# Altium PCB PCB_PXN-2119_2022-04-26.pcbdoc
Units mil, origin at the board's own origin, x right, y up, seen from the top; angles counter-clockwise.
Board outline 6266.45 x 2395.66 mil, 2 copper layers (Top Layer, Bottom Layer); 84 components, 103 nets, 330 pads, 35 vias.
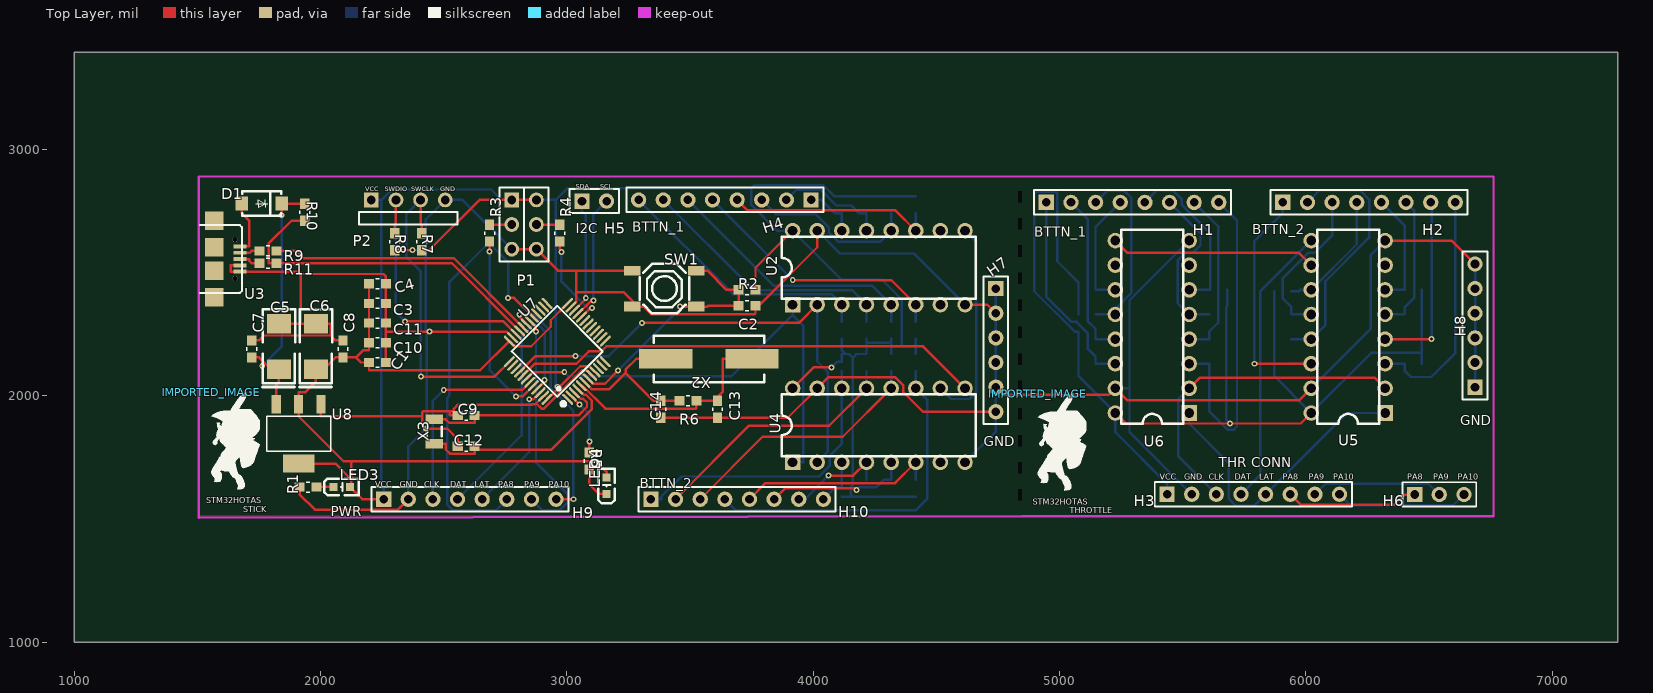
[diagram p0: Top Layer view]
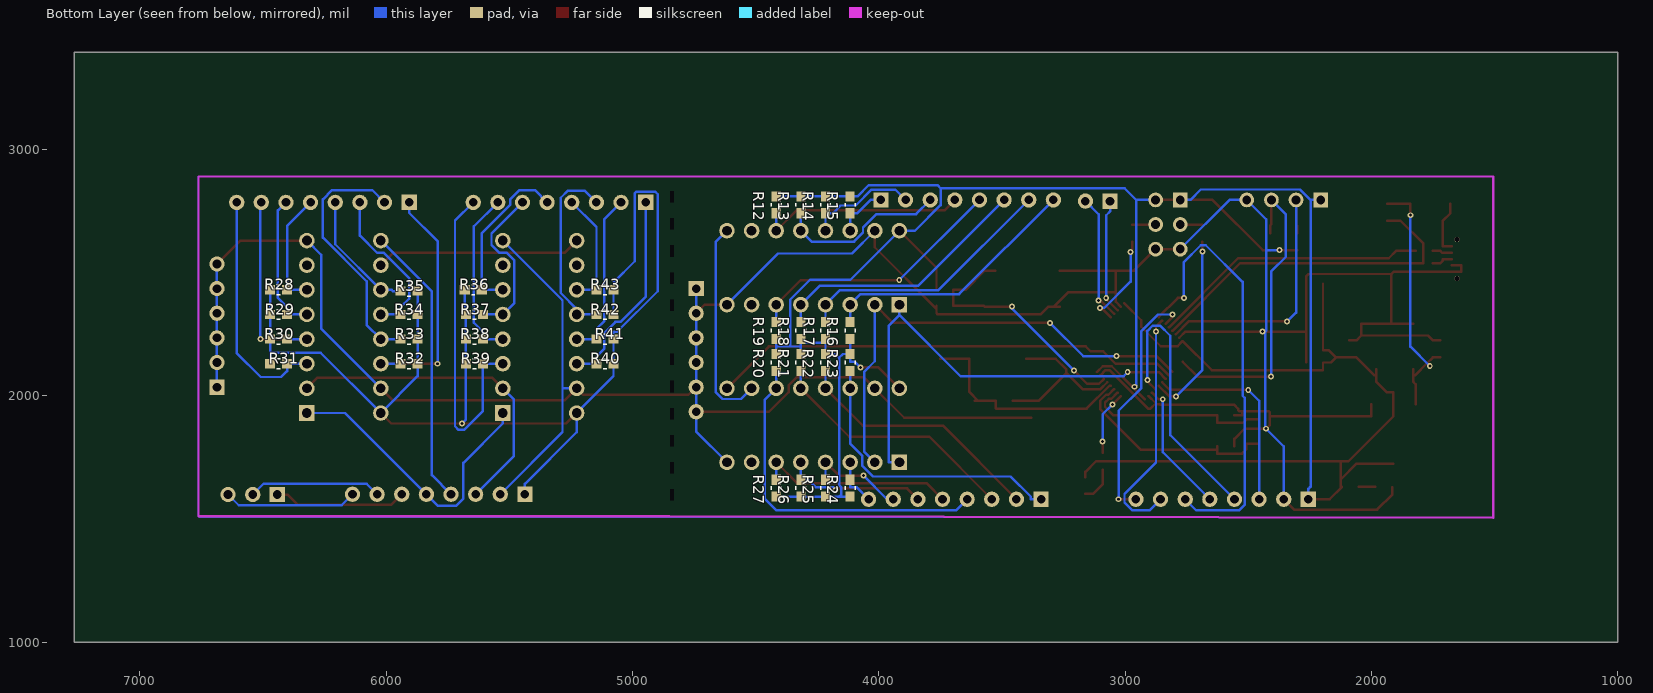
[diagram p1: Bottom Layer view, seen from below]

## Layer stack, top to bottom
Top Layer: signal copper (thickness not stored)
Dielectric: dielectric 12.6, FR-4, Dk 4.8
Bottom Layer: signal copper (thickness not stored)

## Board outline
7266.45,1000 1000,1000 1000,3395.66 7266.45,3395.66
cut-out: 4831.45,1575.66 4846.45,1575.66 4846.45,1620.66 4831.45,1620.66
cut-out: 4831.45,1685.66 4846.45,1685.66 4846.45,1730.66 4831.45,1730.66
cut-out: 4831.45,1795.66 4846.45,1795.66 4846.45,1840.66 4831.45,1840.66
cut-out: 4831.45,1905.66 4846.45,1905.66 4846.45,1950.66 4831.45,1950.66
cut-out: 4831.45,2015.66 4846.45,2015.66 4846.45,2060.66 4831.45,2060.66
cut-out: 4831.45,2125.66 4846.45,2125.66 4846.45,2170.66 4831.45,2170.66
cut-out: 4831.45,2235.66 4846.45,2235.66 4846.45,2280.66 4831.45,2280.66
cut-out: 4831.45,2785.66 4846.45,2785.66 4846.45,2830.66 4831.45,2830.66
cut-out: 4831.45,2675.66 4846.45,2675.66 4846.45,2720.66 4831.45,2720.66
cut-out: 4831.45,2565.66 4846.45,2565.66 4846.45,2610.66 4831.45,2610.66
cut-out: 4831.45,2455.66 4846.45,2455.66 4846.45,2500.66 4831.45,2500.66
cut-out: 4831.45,2345.66 4846.45,2345.66 4846.45,2390.66 4831.45,2390.66

## Components (designator, comment, footprint, x,y, rotation, side; value= is the part's Value field where it differs from the comment)
C1 "100nF" 0603_1608METRIC_PAD1.05X0.95MM_HANDSOLDER#1 2231.45,2135.66 r180 top
C2 "1uF" 0603_1608METRIC_PAD1.05X0.95MM_HANDSOLDER#1 3731.45,2365.66 r180 top
C3 "100nF" 0603_1608METRIC_PAD1.05X0.95MM_HANDSOLDER#1 2231.45,2375.66 r180 top
C4 "100nF" 0603_1608METRIC_PAD1.05X0.95MM_HANDSOLDER#1 2231.45,2455.66 r180 top
C5 "100uF" CASE-C_6032 1831.45,2200.66 r270 top
C6 "330uF" CASE-C_6032 1981.45,2200.66 r270 top
C7 "100nF" 0603_1608METRIC_PAD1.05X0.95MM_HANDSOLDER#1 1721.45,2190.66 r270 top
C8 "100nF" 0603_1608METRIC_PAD1.05X0.95MM_HANDSOLDER#1 2091.45,2190.66 r270 top
C9 "20pF" 0603_1608METRIC_PAD1.05X0.95MM_HANDSOLDER#1 2591.45,1920.66 r0 top
C10 "100nF" 0603_1608METRIC_PAD1.05X0.95MM_HANDSOLDER#1 2231.45,2215.66 r180 top
C11 "100nF" 0603_1608METRIC_PAD1.05X0.95MM_HANDSOLDER#1 2231.45,2295.66 r180 top
C12 "20pF" 0603_1608METRIC_PAD1.05X0.95MM_HANDSOLDER#1 2591.45,1795.66 r0 top
C13 "20pF" 0603_1608METRIC_PAD1.05X0.95MM_HANDSOLDER#1 3611.45,1945.66 r90 top
C14 "20pF" 0603_1608METRIC_PAD1.05X0.95MM_HANDSOLDER#1 3381.45,1945.66 r90 top
D1 "SS110-A" SMA(DO-214AC) 1761.45,2780.66 r0 top
H1 "HDR-F-2.54_1x8" HDR-F-2.54_1X8 5246.45,2785.66 r0 top
H2 "HDR-F-2.54_1x8" HDR-F-2.54_1X8 6206.45,2785.66 r0 top
H3 "THR_CONN-T" HDR-F-2.54_1X8 5736.45,1600.66 r0 top
H4 "HDR-F-2.54_1x8" HDR-F-2.54_1X8 3691.45,2795.66 r180 top
H5 "ADC_S" HDR-F-2.54_1X2 3111.45,2790.66 r0 top
H6 "HDR-F-2.54_1x3" HDR-F-2.54_1X3 6541.45,1599.66 r0 top
H7 "GND_BAR-S" HDR-F-2.54_1X6 4741.45,2235.66 r270 top
H8 "GND_BAR-T" HDR-F-2.54_1X6 6686.45,2235.66 r90 top
H9 "THR_CONN-S" HDR-F-2.54_1X8 2556.45,1580.66 r0 top
H10 "HDR-F-2.54_1x8" HDR-F-2.54_1X8 3641.45,1580.66 r0 top
IMPORTED_IMAGE "IMPORTED_IMAGE" IMPORTED_IMAGE 1556.46,2014.06 r0 top
IMPORTED_IMAGE "IMPORTED_IMAGE" IMPORTED_IMAGE 4911.46,2009.06 r0 top
LED3 "KT-0603R" LED0603-R-RD 2086.45,1630.66 r0 top
LED4 "KT-0603R" LED0603-R-RD 3161.45,1635.66 r90 top
P1 "HDR-IDC-2.54-2X3P" HEADER-2.54-P2×3 2826.45,2695.66 r0 top
P2 "SWD" HEADER-2.54-P4-ANG 2356.45,2795.66 r0 top
R1 "510" 0603_1608METRIC_PAD1.05X0.95MM_HANDSOLDER#1 1949.95,1630.06 r180 top
R2 "10K" 0603_1608METRIC_PAD1.05X0.95MM_HANDSOLDER#1 3731.45,2430.66 r0 top
R3 "100K" 0603_1608METRIC_PAD1.05X0.95MM_HANDSOLDER#1 2686.45,2660.66 r90 top
R4 "100K" 0603_1608METRIC_PAD1.05X0.95MM_HANDSOLDER#1 2971.45,2660.66 r90 top
R5 "510" 0603_1608METRIC_PAD1.05X0.95MM_HANDSOLDER#1 3091.45,1735.66 r90 top
R6 "1M" 0603_1608METRIC_PAD1.05X0.95MM_HANDSOLDER#1 3491.45,1980.66 r0 top
R7 "10K" 0603_1608METRIC_PAD1.05X0.95MM_HANDSOLDER#1 2411.45,2625.66 r90 top
R8 "10K" 0603_1608METRIC_PAD1.05X0.95MM_HANDSOLDER#1 2301.45,2625.66 r90 top
R9 "20" 0603_1608METRIC_PAD1.05X0.95MM_HANDSOLDER#1 1786.85,2588.58 r0 top
R10 "1.5K" 0603_1608METRIC_PAD1.05X0.95MM_HANDSOLDER#1 1936.45,2745.66 r90 top
R11 "20" 0603_1608METRIC_PAD1.05X0.95MM_HANDSOLDER#1 1786.85,2538.58 r0 top
R12 "10K" 0603_1608METRIC_PAD1.05X0.95MM_HANDSOLDER#2 4416.45,2775.66 r270 bottom
R13 "10K" 0603_1608METRIC_PAD1.05X0.95MM_HANDSOLDER#2 4316.45,2775.66 r270 bottom
R14 "10K" 0603_1608METRIC_PAD1.05X0.95MM_HANDSOLDER#2 4216.45,2775.66 r270 bottom
R15 "10K" 0603_1608METRIC_PAD1.05X0.95MM_HANDSOLDER#2 4116.45,2775.66 r270 bottom
R16 "10K" 0603_1608METRIC_PAD1.05X0.95MM_HANDSOLDER#2 4116.45,2265.66 r90 bottom
R17 "10K" 0603_1608METRIC_PAD1.05X0.95MM_HANDSOLDER#2 4216.45,2265.66 r90 bottom
R18 "10K" 0603_1608METRIC_PAD1.05X0.95MM_HANDSOLDER#2 4316.45,2265.66 r90 bottom
R19 "10K" 0603_1608METRIC_PAD1.05X0.95MM_HANDSOLDER#2 4416.45,2265.66 r90 bottom
R20 "10K" 0603_1608METRIC_PAD1.05X0.95MM_HANDSOLDER#2 4416.45,2135.66 r270 bottom
R21 "10K" 0603_1608METRIC_PAD1.05X0.95MM_HANDSOLDER#2 4316.45,2135.66 r270 bottom
R22 "10K" 0603_1608METRIC_PAD1.05X0.95MM_HANDSOLDER#2 4216.45,2135.66 r270 bottom
R23 "10K" 0603_1608METRIC_PAD1.05X0.95MM_HANDSOLDER#2 4116.45,2135.66 r270 bottom
R24 "10K" 0603_1608METRIC_PAD1.05X0.95MM_HANDSOLDER#2 4116.45,1625.66 r90 bottom
R25 "10K" 0603_1608METRIC_PAD1.05X0.95MM_HANDSOLDER#2 4216.45,1625.66 r90 bottom
R26 "10K" 0603_1608METRIC_PAD1.05X0.95MM_HANDSOLDER#2 4316.45,1625.66 r90 bottom
R27 "10K" 0603_1608METRIC_PAD1.05X0.95MM_HANDSOLDER#2 4416.45,1625.66 r90 bottom
R28 "10K" 0603_1608METRIC_PAD1.05X0.95MM_HANDSOLDER#2 6436.45,2430.66 r180 bottom
R29 "10K" 0603_1608METRIC_PAD1.05X0.95MM_HANDSOLDER#2 6436.45,2330.66 r180 bottom
R30 "10K" 0603_1608METRIC_PAD1.05X0.95MM_HANDSOLDER#2 6436.45,2230.66 r180 bottom
R31 "10K" 0603_1608METRIC_PAD1.05X0.95MM_HANDSOLDER#2 6436.45,2130.66 r180 bottom
R32 "10K" 0603_1608METRIC_PAD1.05X0.95MM_HANDSOLDER#2 5906.45,2130.66 r0 bottom
R33 "10K" 0603_1608METRIC_PAD1.05X0.95MM_HANDSOLDER#2 5906.45,2230.66 r0 bottom
R34 "10K" 0603_1608METRIC_PAD1.05X0.95MM_HANDSOLDER#2 5906.45,2330.66 r0 bottom
R35 "10K" 0603_1608METRIC_PAD1.05X0.95MM_HANDSOLDER#2 5906.45,2425.66 r0 bottom
R36 "10K" 0603_1608METRIC_PAD1.05X0.95MM_HANDSOLDER#2 5646.45,2430.66 r180 bottom
R37 "10K" 0603_1608METRIC_PAD1.05X0.95MM_HANDSOLDER#2 5641.45,2330.66 r180 bottom
R38 "10K" 0603_1608METRIC_PAD1.05X0.95MM_HANDSOLDER#2 5641.45,2230.66 r180 bottom
R39 "10K" 0603_1608METRIC_PAD1.05X0.95MM_HANDSOLDER#2 5641.45,2130.66 r180 bottom
R40 "10K" 0603_1608METRIC_PAD1.05X0.95MM_HANDSOLDER#2 5111.45,2130.66 r0 bottom
R41 "10K" 0603_1608METRIC_PAD1.05X0.95MM_HANDSOLDER#2 5111.45,2230.66 r0 bottom
R42 "10K" 0603_1608METRIC_PAD1.05X0.95MM_HANDSOLDER#2 5111.45,2330.66 r0 bottom
R43 "10K" 0603_1608METRIC_PAD1.05X0.95MM_HANDSOLDER#2 5111.45,2430.66 r0 bottom
SW1 "TS-1187A-B-A-B" SW-SMD_4P-L5.1-W5.1-P3.70-LS6.5-TL-2 3396.45,2435.66 r0 top
U2 "SN74HC165N" DIP-16_L19.8-W6.5-P2.54-LS7.6-BL 4266.45,2520.66 r0 top
U3 "Micro USB-B 5P_C40942" USB-MICROB 1511.45,2555.66 r270 top
U4 "SN74HC165N" DIP-16_L19.8-W6.5-P2.54-LS7.6-BL 4266.45,1880.66 r0 top
U5 "SN74HC165N" DIP-16_L19.8-W6.5-P2.54-LS7.6-BL 6171.45,2280.66 r90 top
U6 "SN74HC165N" DIP-16_L19.8-W6.5-P2.54-LS7.6-BL 5376.45,2280.66 r90 top
U7 "STM32F103C8T6" LQFP-48_L7.0-W7.0-P0.50-LS9.0-BL 2961.45,2180.66 r45 top
U8 "AMS1117-3.3" SOT-223 1911.45,1845.66 r180 top
X2 "8MHz" CRYSTAL-SMD_L11.5-W4.8-LS12.7 3576.45,2150.66 r180 top
X3 "32.768kHz" FC-135R_L3.2-W1.5 2461.45,1855.66 r90 top

## Footprints (in the part's own frame and the unit in brackets; to place one, negate y for a bottom-side part, rotate by r counter-clockwise, add the part's x,y. Pads: shape width x height; smd on the part's side, far side on the other; paste and mask are expansions set on the pad)
0603_1608METRIC_PAD1.05X0.95MM_HANDSOLDER#1 [mm]
  rect 1.05x0.95 smd: 1(-0.875,0) 2(0.875,0)
  silkscreen extent -0.17,-0.51 0.17,0.51
0603_1608METRIC_PAD1.05X0.95MM_HANDSOLDER#2 [mm]
  rect 1.05x0.95 smd: 1(0.875,0) 2(-0.875,0)
  silkscreen extent -0.17,-0.51 0.17,0.51
CASE-C_6032 [mm]
  rect 2x2.5 smd: 1(2.35,0) 2(-2.35,0)
  silkscreen extent -3.84,-1.68 4.17,1.7
CRYSTAL-SMD_L11.5-W4.8-LS12.7 [mm]
  rect 5.5x2 smd: 1(-4.45,0) 2(4.45,0)
  silkscreen extent -5.7,-2.4 5.7,2.4
DIP-16_L19.8-W6.5-P2.54-LS7.6-BL [mm]
  rect 1.6x1.6 hole 1: 1(-8.89,-3.81)
  round 1.6 hole 1: 2(-6.35,-3.81) 3(-3.81,-3.81) 4(-1.27,-3.81) 5(1.27,-3.81) 6(3.81,-3.81) 7(6.35,-3.81) 8(8.89,-3.81) 9(8.89,3.81) 10(6.35,3.81) 11(3.81,3.81) 12(1.27,3.81) 13(-1.27,3.81) 14(-3.81,3.81) 15(-6.35,3.81) 16(-8.89,3.81)
  silkscreen extent -10,-3.2 10,3.2
FC-135R_L3.2-W1.5 [mm]
  rect 1x1.8 smd: 1(-1.25,0) 2(1.25,0)
  silkscreen extent -0.51,-0.76 0.51,0.76
HDR-F-2.54_1X2 [mil]
  rect 62x62 hole 35: 1(-50,0)
  round 62 hole 35: 2(50,0)
  silkscreen extent -100,-49 100,50
HDR-F-2.54_1X3 [mil]
  rect 62x62 hole 35: 1(-100,0)
  round 62 hole 35: 2(0,0)
  round 62 hole 36: 3(100,0)
  silkscreen extent -150,-49 150,50
HDR-F-2.54_1X6 [mil]
  rect 62x62 hole 35: 1(-200,0)
  round 62 hole 35: 2(-100,0) 3(0,0) 4(100,0) 5(200,0) 6(300,0)
  silkscreen extent -250,-50 350,50
HDR-F-2.54_1X8 [mil]
  rect 62x62 hole 35: 1(-300,0)
  round 62 hole 35: 2(-200,0) 3(-100,0) 4(0,0) 5(100,0) 6(200,0) 7(300,0) 8(400,0)
  silkscreen extent -350,-50 450,50
HEADER-2.54-P2×3 [mil]
  rect 60x60 hole 36: 1(-50,100)
  round 60 hole 36: 2(50,100) 3(-50,0) 4(50,0) 5(-50,-100) 6(50,-100)
  silkscreen extent -100,-150 100,150
HEADER-2.54-P4-ANG [mil]
  rect 60x60 hole 36: 1(-150,0)
  round 60 hole 36: 2(-50,0) 3(50,0) 4(150,0)
  silkscreen extent -200,-100 200,-50
IMPORTED_IMAGE [mil]
  silkscreen extent 0,-394 197,0
LED0603-R-RD [mm]
  rect 0.8x0.8 smd: 1(0.851,0) 2(-0.851,0)
  silkscreen extent -1.82,-0.86 1.77,0.86
LQFP-48_L7.0-W7.0-P0.50-LS9.0-BL [mm]
  oval 0.27x1.5 smd: 1(-2.75,-4.25) 2(-2.25,-4.25) 3(-1.75,-4.25) 4(-1.25,-4.25) 5(-0.75,-4.25) 6(-0.25,-4.25) 7(0.25,-4.25) 8(0.75,-4.25) 9(1.25,-4.25) 10(1.75,-4.25) 11(2.25,-4.25) 12(2.75,-4.25) 25(2.75,4.25) 26(2.25,4.25) 27(1.75,4.25) 28(1.25,4.25) 29(0.75,4.25) 30(0.25,4.25) 31(-0.25,4.25) 32(-0.75,4.25) 33(-1.25,4.25) 34(-1.75,4.25) 35(-2.25,4.25) 36(-2.75,4.25)
  oval 1.5x0.27 smd: 13(4.25,-2.75) 14(4.25,-2.25) 15(4.25,-1.75) 16(4.25,-1.25) 17(4.25,-0.75) 18(4.25,-0.25) 19(4.25,0.25) 20(4.25,0.75) 21(4.25,1.25) 22(4.25,1.75) 23(4.25,2.25) 24(4.25,2.75) 37(-4.25,2.75) 38(-4.25,2.25) 39(-4.25,1.75) 40(-4.25,1.25) 41(-4.25,0.75) 42(-4.25,0.25) 43(-4.25,-0.25) 44(-4.25,-0.75) 45(-4.25,-1.25) 46(-4.25,-1.75) 47(-4.25,-2.25) 48(-4.25,-2.75)
  silkscreen extent -3.59,-4.46 3.3,3.34
SMA(DO-214AC) [mil]
  rect 50x57.9 smd: 1(-81,0) 2(81,0)
  silkscreen extent -78,-49 79,49
SOT-223 [mm]
  rect 0.95x1.9 smd: 1(-2.3,-3.05) 2(0,-3.05) 3(2.3,-3.05)
  rect 3.25x1.9 smd: 4(0,3.05)
  silkscreen extent -3.3,-1.8 3.3,1.8
SW-SMD_4P-L5.1-W5.1-P3.70-LS6.5-TL-2 [mm]
  rect 1.7x1 smd: 1(-3.3,1.849) 2(3.3,1.85) 3(-3.3,-1.85) 4(3.3,-1.85)
  silkscreen extent -2.55,-2.55 2.55,2.55
USB-MICROB [mm]
  rect 1.9x1.9 smd: 0(-3.95,1.45) 0(-1.2,1.45) 0(1.2,1.45) 0(3.95,1.45)
  rect 0.4x1.35 smd: 1(-1.3,4.125) 2(-0.65,4.125) 3(0,4.125) 4(0.65,4.125) 5(1.3,4.125)
  round 0.5 hole 0.5 unplated: ""(-2,3.6) ""(2,3.6)
  silkscreen extent -3.5,0 3.5,4.3

## Via types
v1: diameter 24.02, hole 12.01, Top Layer to Bottom Layer, tented both sides, 33 vias
v2: diameter 24, hole 12, Top Layer to Bottom Layer, tented both sides, 2 vias

## Nets (pads, with @x,y where several pads share a name; then routed paths per layer and width w, separated by ;. In a path a pad name is that pad's centre, name@x,y a point inside that pad or via, vN(x,y) a via of type N, cw(c..) or ccw(c..) an arc to the next point about the centre after c; other vN are vias at no path point)
+5V: C5.1 C7.2 D1.2 R10.2 U8.3 | length 1089.4
  Top Layer w10: C7.2@1721.45,2156.21 1751.14,2156.21 1774.9,2132.45 ; v1(1763.64,2121.19) 1774.9,2132.45 ; U8.3 1820.9,2047.23 1831.45,2057.78 C5.1@1831.45,2082.96 ; C5.1@1831.45,2108.14 C5.1@1831.45,2082.96 ; v1@1842.45,2733.49 1842.45,2780.66 1906.21,2780.66 1906.76,2780.11 R10.2@1936.45,2780.11 ; 1774.9,2132.45 1824.39,2082.96 C5.1@1831.45,2082.96
  Bottom Layer w10: v1(1763.64,2121.19) 1842.45,2200 v1@1842.45,2733.49
  other v1: 1842.45,2733.49
BOOT0: R3.1 U7.44 | length 760.5
  Top Layer w10: v1@2686.45,2585.78 R3.1@2686.45,2626.21 ; v1(2794.01,1998.18) 2820.73,1998.18 U7.44
  Bottom Layer w10: v1@2686.45,2585.78 2686.45,2105.74 v1(2794.01,1998.18)
  other v1: 2686.45,2585.78
BOOT1: R4.1 U7.20 | length 390.4
  Top Layer w10: R4.1@2971.45,2626.21 2971.45,2594.55 2978.22,2587.78 v1(2978.22,2585.02) ; U7.20 3096.25,2357.21 v1(3101.43,2357.21)
  Bottom Layer w10: v1(2978.22,2585.02) 2978.22,2464.19 3085.2,2357.21 v1(3101.43,2357.21)
D1_1: D1.1 U3.1 | length 224.2
  Top Layer w10: U3.1@1673.85,2606.84 1711.42,2606.84 1711.42,2709.75 1680.45,2740.72 D1.1@1680.45,2780.66
GND: C1.1 C2.1 C3.1 C4.1 C5.2 C6.2 C7.1 C8.1 C9.1 C10.1 C11.1 C12.1 C13.1 C14.1 H3.2 H7.1 H7.2 H7.3 H7.4 H7.5 H7.6 H8.1 H8.2 H8.3 H8.4 H8.5 H8.6 H9.2 P1.5 P1.6 P2.4 R1.2 R8.1 SW1.1 SW1.3 U2.8 U2.15 U3.4 U3.5 U4.8 U4.15 U5.8 U5.15 U6.8 U6.15 U7.8 U7.23 U7.35 U7.47 U8.1 | length 15600.5
  Top Layer w10: U3.4@1673.85,2530.07 1636.29,2530.07 1636.29,2504.48 1673.85,2504.48 1910.11,2504.48 1919.67,2494.92 ; C7.1@1721.45,2225.11 1751.14,2225.11 1771.25,2245.22 2041.65,2245.22 ; C5.2@1831.45,2293.18 1919.67,2293.18 ; R1.2 1915.5,1600.37 1977.27,1538.6 2314.39,1538.6 H9.2@2356.45,1580.66 ; U8.1 2002,1917.35 2413.41,1917.35 ; C8.1@2091.45,2225.11 2061.76,2225.11 2041.65,2245.22 ; C1.1 C10.1 2265.9,2260.93 ; R8.1@2301.45,2591.21 2331.14,2591.21 2331.58,2591.65 v1(2373.73,2591.65) ; C12.1 2557,1825.35 2515.49,1866.86 v1(2428.08,1866.86) 2413.41,1881.53 2413.41,1917.35 ; C9.1 2525.34,1920.66 2525.34,1937.57 ; P1.5@2776.45,2595.66 2876.45,2595.66 2963.65,2508.46 3038.12,2508.46 ; U7.35 2755.91,2260.93 v1(2441.99,2260.93) 2265.9,2260.93 ; U7.47 2876.13,1970.06 ; U7.23 3038.12,2382.6 3038.12,2421.12 ; U7.8 3079.36,2104.52 3063.14,2104.52 2907.18,1948.56 2897.62,1948.56 2876.13,1970.06 ; SW1.3 SW1.3@3288.76,2362.81 ; SW1.1 3222.07,2508.46 3038.12,2508.46 ; C14.1@3381.45,1911.21 3611.45,1911.21 3897,1911.21 U4.15 4060.84,2075.05 4333.56,2075.05 4366.45,2042.16 4366.45,2015.13 4445.92,1935.66 H7.6@4741.45,1935.66 ; C2.1 C2.1@3765.9,2352.87 ; U2.15 4016.45,2603.42 C2.1@3765.9,2352.87 ; U2.8 4706.45,2370.66 H7.2@4741.45,2335.66 ; H7.5@4741.45,2035.66 4772.51,2004.6 5200.39,2004.6 5226.45,2030.66 5274.04,1983.07 5973.86,1983.07 U5.15@6021.45,2030.66 ; U5.8@6321.45,2630.66 6591.45,2630.66 H8.6@6686.45,2535.66 ; 1919.67,2293.18 1919.67,2494.92 ; 1919.67,2293.18 1981.45,2293.18 2041.65,2293.18 2041.65,2245.22 ; 1919.67,2494.92 2256.33,2494.92 2265.9,2485.35 C4.1 C3.1 2265.9,2325.35 C11.1 2265.9,2260.93 ; 2413.41,1917.35 2413.41,1934.66 2416.32,1937.57 2525.34,1937.57 ; 2525.34,1937.57 2536.25,1937.57 2541.09,1942.41 2541.09,1947.51 2557.02,1963.44 2857.16,1963.44 2859,1965.28 2871.35,1965.28 2876.13,1970.06 ; 3038.12,2421.12 3038.12,2508.46 ; 3038.12,2421.12 3230.45,2421.12 SW1.3@3288.76,2362.81 ; SW1.3@3288.76,2362.81 3310.98,2362.81 3341.72,2332.07 3762,2332.07 3765.9,2335.97 C2.1@3765.9,2352.87
  Bottom Layer w10: H9.2@2356.45,1580.66 2356.45,1795.23 v1(2428.08,1866.86) 2430.71,1869.49 v1@2430.71,2260.93 ; v1(2373.73,2591.65) 2428.08,2591.65 ; v1(2441.99,2260.93) v1@2430.71,2260.93 ; P1.5@2776.45,2595.66 2576.45,2795.66 2506.45,2795.66 2428.08,2717.29 2428.08,2591.65 ; U2.15 4109.01,2578.1 4409.01,2578.1 U2.8 ; U4.8 4741.45,1855.66 4741.45,1935.66 4741.45,2035.66 4741.45,2135.66 4741.45,2235.66 4741.45,2335.66 H7.1@4741.45,2435.66 ; U6.15@5226.45,2030.66 5283.89,2030.66 ; U6.8@5526.45,2630.66 5285.06,2389.27 5285.06,2389.08 5283.89,2387.91 5283.89,2030.66 ; H3.2@5536.45,1600.66 5283.89,1853.22 5283.89,2030.66 ; U5.15@6021.45,2030.66 6264.01,2273.22 6264.01,2573.22 U5.8@6321.45,2630.66 ; H8.1@6686.45,2035.66 6686.45,2135.66 6686.45,2235.66 6686.45,2335.66 6686.45,2435.66 H8.6@6686.45,2535.66 ; 2428.08,2591.65 2428.08,2263.56 v1@2430.71,2260.93
H3_6: H3.6 H6.1 | length 540.2
  Top Layer w10: H3.6@5936.45,1600.66 5979.44,1557.67 6357.47,1557.67 6399.46,1599.66 H6.1@6441.45,1599.66
H3_7: H3.7 H6.2 | length 541
  Bottom Layer w10: H3.7@6036.45,1600.66 6079.39,1643.6 6497.51,1643.6 H6.2@6541.45,1599.66
H3_8: H3.8 H6.3 | length 541.4
  Bottom Layer w10: H3.8@6136.45,1600.66 6180.88,1556.23 6598.02,1556.23 H6.3@6641.45,1599.66
OSCIN: C13.2 R6.2 U7.5 X2.1 | length 926.7
  Top Layer w10: U7.5 3063.57,2041.47 3156.66,1948.38 3523.31,1948.38 3525.9,1950.97 R6.2 3581.21,1980.66 3581.76,1980.11 C13.2@3596.61,1980.11 ; C13.2@3611.45,1980.11 C13.2@3596.61,1980.11 ; X2.1 3632.39,2150.66 3632.39,2015.89 C13.2@3596.61,1980.11
OSCOUT: C14.2 R6.1 U7.6 X2.2 | length 664.4
  Top Layer w10: U7.6 3100.29,2027.91 3173.04,2027.91 3238.5,2093.37 ; X2.2@3401.25,2150.66 3281.99,2150.66 3238.5,2107.17 3238.5,2093.37 ; R6.1 3411.69,1980.66 3411.14,1980.11 3396.3,1980.11 3381.45,1980.11 3351.76,1980.11 3238.5,2093.37
P1_3: P1.3 R3.2 | length 90.2
  Top Layer w10: R3.2@2686.45,2695.11 2716.14,2695.11 2716.69,2695.66 P1.3@2776.45,2695.66
P1_4: P1.4 R4.2 | length 95.2
  Top Layer w10: P1.4@2876.45,2695.66 2941.21,2695.66 2941.76,2695.11 R4.2@2971.45,2695.11
PA0: U7.10
PA1: U7.11
PA2: U7.12
PA3: U7.13
PA4: U7.14
PA5: U7.15
PA6: U7.16
PA7: U7.17
PA8: H9.6 U7.29 | length 1786
  Top Layer w10: v1(2761.93,2397.75) 2786.12,2397.75 U7.29
  Bottom Layer w10: H9.6@2756.45,1580.66 2711.39,1535.6 2538,1535.6 2514.34,1559.26 2514.34,1991.63 2523.61,2000.9 2523.61,2462.57 2672.85,2611.81 2693.25,2611.81 2761.93,2543.13 v1(2761.93,2397.75)
PA9: H9.7 U7.30 | length 979.9
  Top Layer w10: U7.30 2874.87,2281.16 v1(2874.87,2262.09)
  Bottom Layer w10: H9.7@2856.45,1580.66 2901.47,1535.64 2970.93,1535.64 3002.86,1567.57 3002.86,1602.36 2874.87,1730.35 v1(2874.87,2262.09)
PA10: H9.8 U7.31 | length 996.4
  Top Layer w10: v1(2807.18,2330.46) 2807.18,2321.02 U7.31 ; H9.8@2956.45,1580.66 v1(3026.59,1580.66)
  Bottom Layer w10: v1(2807.18,2330.46) 2867.12,2330.46 2934.32,2263.26 2934.32,2032.08 3026.59,1939.81 v1(3026.59,1580.66)
PA11: R9.2 U7.32 | length 1129.6
  Top Layer w10: R9.2 1900.15,2588.58 1930.07,2558.66 2541.69,2558.66 U7.32
PA12: R10.1 R11.2 U7.33 | length 1397.5
  Top Layer w10: R10.1@1936.45,2711.21 1882.44,2711.21 1789.57,2618.34 1789.57,2538.65 1789.64,2538.58 R11.2 1833.16,2538.58 1852.96,2538.58 2533.94,2538.58 U7.33
PA15: U7.38
PB0: U7.18
PB1: U7.19
PB3: U7.39
PB4: U2.2 U4.2 U7.40 | length 1997.1
  Top Layer w10: U7.40@2808.34,2097.14 2872.58,2161.38 v1(3035.61,2161.38) ; v1(3305.41,2296.45) 3942.24,2296.45 U2.2
  Bottom Layer w10: v1(3035.61,2161.38) 3170.34,2161.38 v1(3305.41,2296.45) ; U4.2 4059.53,1773.74 4059.53,2097.79 4016.45,2140.87 U2.2
PB5: U4.9 U7.41 | length 1913.6
  Top Layer w10: U7.41 2868.77,2129.74 3038.25,2129.74 3089.18,2180.67 3139.82,2180.67 3160.24,2201.09 4446.02,2201.09 U4.9
PB6: U2.1 U4.1 U7.42 | length 1902.4
  Top Layer w10: U7.42 2863.28,2096.41 v1(2989.74,2096.41)
  Bottom Layer w10: v1(2989.74,2096.41) 3006.42,2079.73 3668,2079.73 3916.45,2328.18 ; U4.1 3937.69,1730.66 3958.93,1730.66 3960.2,1731.93 3960.2,2284.43 3916.45,2328.18 ; U2.1 3916.45,2370.47 3916.45,2328.18
PB7: H9.3 U7.43 | length 824.4
  Top Layer w10: v1@2500.55,2024.42 2819.13,2024.42 U7.43
  Bottom Layer w10: H9.3@2456.45,1580.66 2456.45,1980.32 v1@2500.55,2024.42
  other v1: 2500.55,2024.42
PB8: H9.4 U7.45 | length 1139.7
  Top Layer w10: U7.45 2909.6,2059.21 v1(2909.6,2064.9)
  Bottom Layer w10: H9.4@2556.45,1580.66 2817.08,1841.29 2817.08,2244.17 2858.4,2285.49 2888.3,2285.49 2909.6,2264.19 v1(2909.6,2064.9)
PB9: H9.5 U7.46 | length 540.5
  Top Layer w10: v1(2847.6,1986.5) 2864.73,1986.5 U7.46
  Bottom Layer w10: H9.5@2656.45,1580.66 2847.6,1771.81 v1(2847.6,1986.5)
PB10: H5.2 U7.21 | length 510
  Top Layer w10: U7.21 3045.29,2333.77 3099.47,2387.95 v1(3107.53,2387.95)
  Bottom Layer w10: v1(3107.53,2387.95) 3107.53,2736.74 H5.2@3161.45,2790.66
PB11: H5.1 U7.22 | length 468.4
  Top Layer w10: U7.22 3076.96,2393.6 v1(3076.96,2398.06)
  Bottom Layer w10: H5.1@3061.45,2790.66 3061.45,2748.67 3076.96,2733.16 v1(3076.96,2398.06)
PB12: U7.25
PB13: U7.26
PB14: U7.27
PB15: U7.28
PC13: R5.2 U7.2 | length 260.5
  Top Layer w10: U7.2 3051.18,1965.66 v2(3051.45,1965.66) ; R5.2 v2(3091.45,1815.66)
  Bottom Layer w10: v2(3051.45,1965.66) 3091.45,1925.66 v2(3091.45,1815.66)
PC14: C9.2 U7.3 X3.2 | length 755.4
  Top Layer w10: X3.2 2507.88,1904.88 2521.86,1890.9 2625.83,1890.9 2625.9,1890.97 C9.2 3046.69,1920.66 3081.99,1955.96 3081.99,1972.9 3066.17,1988.72 3055.96,1988.72 U7.3
PC15: C12.2 U7.4 X3.1 | length 878.7
  Top Layer w10: X3.1@2461.46,1806.45 2507.88,1806.45 2507.88,1783.45 2525.43,1765.9 2625.83,1765.9 2625.9,1765.97 C12.2@2625.9,1780.82 ; C12.2 C12.2@2625.9,1780.82 ; U7.4 3067.74,2004.78 3077.42,2004.78 3101.67,1980.53 3101.67,1947.13 2935.36,1780.82 C12.2@2625.9,1780.82
R1_1: LED3.2 R1.1 | length 68.6
  Top Layer w10: R1.1@1984.35,1630.66 LED3.2
R5_1: LED4.2 R5.1 | length 146.4
  Top Layer w10: R5.1 3091.45,1640.66 3129.95,1602.16 LED4.2
R9_1: R9.1 U3.2 | length 81.6
  Top Layer w10: U3.2@1673.85,2581.25 1713.41,2581.25 1720.74,2588.58 R9.1
R11_1: R11.1 U3.3 | length 90.2
  Top Layer w10: U3.3@1673.85,2555.66 1711.42,2555.66 1711.42,2547.9 1720.74,2538.58 R11.1
R28_1: H2.5 R28.1 U5.6 | length 475.1
  Bottom Layer w10: H2.5@6306.45,2785.66 6402,2690.11 R28.1 U5.6@6321.45,2430.66
R29_1: H2.6 R29.1 U5.5 | length 564.5
  Bottom Layer w10: U5.5@6321.45,2330.66 R29.1 6402,2360.35 6439.12,2397.47 6439.12,2752.99 H2.6@6406.45,2785.66
R30_1: H2.7 R30.1 U5.4 | length 826
  Top Layer w10: U5.4@6321.45,2230.66 v1(6510.29,2230.66)
  Bottom Layer w10: U5.4@6321.45,2230.66 R30.1 ; H2.7@6506.45,2785.66 6510.29,2781.82 v1(6510.29,2230.66)
R31_1: H2.8 R31.1 U5.3 | length 976.2
  Bottom Layer w10: U5.3@6321.45,2130.66 R31.1 6402,2100.97 6426.11,2076.86 6508.69,2076.86 6606.45,2174.62 H2.8@6606.45,2785.66
R32_1: H2.1 R32.1 U5.14 | length 1013.7
  Top Layer w10: v1(5791.12,2130.66) U5.14@6021.45,2130.66
  Bottom Layer w10: v1(5791.12,2130.66) 5791.12,2628.34 5906.45,2743.67 H2.1@5906.45,2785.66 ; R32.1 U5.14@6021.45,2130.66
R33_1: H2.2 R33.1 U5.13 | length 1031.2
  Bottom Layer w10: R33.1 6021.45,2230.66 6078.89,2288.1 6078.89,2465.39 6256.45,2642.95 6256.45,2797.95 6219.15,2835.25 6056.04,2835.25 H2.2@6006.45,2785.66
R34_1: H2.3 R34.1 U5.12 | length 648.5
  Bottom Layer w10: U5.12@6021.45,2330.66 R34.1 5940.9,2360.35 5906.7,2394.55 5906.7,2478.58 6008.74,2580.62 6036.06,2580.62 6106.45,2651.01 H2.3@6106.45,2785.66
R35_1: H2.4 R35.1 U5.11 | length 514.3
  Bottom Layer w10: R35.1 5972.56,2425.66 5977.56,2430.66 6021.45,2430.66 6206.45,2615.66 H2.4@6206.45,2785.66
R36_1: H1.5 R36.1 U6.6 | length 686.7
  Bottom Layer w10: H1.5@5346.45,2785.66 5396.04,2835.25 5459.15,2835.25 5496.45,2797.95 5496.45,2775.25 5612,2659.7 R36.1 U6.6@5526.45,2430.66
R37_1: H1.6 R37.1 U6.5 | length 663.5
  Bottom Layer w10: H1.6@5446.45,2785.66 5572.19,2659.92 5572.19,2612.57 5540.3,2580.68 5509.92,2580.68 5479.28,2550.04 5479.28,2377.83 5526.45,2330.66 R37.1
R38_1: H1.7 R38.1 U6.4 | length 691.4
  Bottom Layer w10: U6.4@5526.45,2230.66 R38.1 5607,2260.35 5644.09,2297.44 5644.09,2688.02 H1.7@5546.45,2785.66
R39_1: H1.8 R39.1 U6.3 | length 1362.5
  Bottom Layer w10: U6.3@5526.45,2130.66 R39.1 5607,1939.19 5683.79,1862.4 5705.79,1862.4 5720.38,1876.99 5720.38,2711.73 H1.8@5646.45,2785.66
R40_1: H1.1 R40.1 U6.14 | length 830.4
  Bottom Layer w10: H1.1@4946.45,2785.66 4946.45,2402.28 5048.18,2300.55 5069.08,2300.55 5114.17,2255.46 5114.17,2192.08 5145.9,2160.35 R40.1 U6.14@5226.45,2130.66
R41_1: H1.2 R41.1 U6.13 | length 676.7
  Bottom Layer w10: H1.2@5046.45,2785.66 5114.13,2717.98 5114.13,2304.41 5145.9,2272.64 R41.1 U6.13@5226.45,2230.66
R42_1: H1.3 R42.1 U6.12 | length 757.7
  Bottom Layer w10: R42.1 5226.45,2330.66 5226.45,2353.37 5291.24,2418.16 5291.24,2804.28 5262.06,2833.46 5194.25,2833.46 H1.3@5146.45,2785.66
R43_1: H1.4 R43.1 U6.11 | length 477.2
  Bottom Layer w10: U6.11@5226.45,2430.66 R43.1 5145.9,2685.11 H1.4@5246.45,2785.66
RESET: C2.2 R2.1 SW1.2 SW1.4 U7.7 | length 1023
  Top Layer w10: U7.7 3107.49,2048.54 3153.92,2048.54 v1(3208.17,2102.79) ; v1(3459.81,2362.81) SW1.4 3548.6,2362.81 3570.83,2362.81 3573.68,2365.66 C2.2 R2.1 3648.68,2430.66 3570.83,2508.51 SW1.2
  Bottom Layer w10: v1(3208.17,2102.79) 3459.81,2354.43 v1(3459.81,2362.81)
S$65: 
S$10643: 
S$10647: 
S$110540: 
S$110565: 
S$110569: 
SWCLK: P2.3 R7.2 U7.37 | length 1288.4
  Top Layer w10: P2.3@2406.45,2795.66 2406.45,2696.77 2411.45,2691.77 R7.2@2411.45,2660.11 ; v1@2407.65,2078.25 2705.92,2078.25 U7.37
  Bottom Layer w10: P2.3@2406.45,2795.66 2347.51,2736.72 2347.51,2564.89 2407.65,2504.75 v1@2407.65,2078.25
  other v1: 2407.65,2078.25
SWDIO: P2.2 R8.2 U7.34 | length 1119.5
  Top Layer w10: R8.2@2301.45,2660.11 2301.45,2691.77 2306.45,2696.77 P2.2@2306.45,2795.66 ; v1(2342.46,2302.21) 2742.46,2302.21 U7.34
  Bottom Layer w10: P2.2@2306.45,2795.66 2306.45,2338.22 v1(2342.46,2302.21)
U2_3: H4.8 R16.1 U2.3 | length 1071.6
  Bottom Layer w10: H4.8@3291.45,2795.66 3673.9,2413.21 4073.9,2413.21 U2.3 R16.1@4116.45,2300.11
U2_4: H4.7 R17.1 U2.4 | length 1071.6
  Bottom Layer w10: H4.7@3391.45,2795.66 3757.84,2429.27 4157.84,2429.27 U2.4 R17.1@4216.45,2300.11
U2_5: H4.6 R18.1 U2.5 | length 1071.6
  Bottom Layer w10: H4.6@3491.45,2795.66 3840.41,2446.7 4240.41,2446.7 U2.5 R18.1@4316.45,2300.11
U2_6: H4.5 R19.1 U2.6 | length 1071.6
  Top Layer w10: v1(3917.1,2470.01) 4317.1,2470.01 U2.6
  Bottom Layer w10: H4.5@3591.45,2795.66 v1(3917.1,2470.01) ; R19.1@4416.45,2300.11 U2.6
U2_7: U2.7
U2_9: U2.9 U4.10 | length 849.6
  Bottom Layer w10: U4.10 4559.57,1987.54 4633.85,1987.54 4662.85,2016.54 4662.85,2624.26 U2.9
U2_10: U2.10
U2_11: H4.4 R12.1 U2.11 | length 847.3
  Top Layer w10: H4.4@3691.45,2795.66 3733.71,2753.4 4333.71,2753.4 U2.11
  Bottom Layer w10: U2.11 R12.1@4416.45,2741.21
U2_12: H4.3 R13.1 U2.12 | length 696.1
  Bottom Layer w10: H4.3@3791.45,2795.66 3848.92,2738.19 4009.81,2738.19 4064.27,2683.73 4064.27,2662.62 4100.17,2626.72 4272.51,2626.72 U2.12 R13.1@4316.45,2741.21
U2_13: H4.2 R14.1 U2.13 | length 452.9
  Bottom Layer w10: H4.2@3891.45,2795.66 3933.51,2837.72 4029.01,2837.72 4093.79,2772.94 4155.03,2772.94 4186.76,2741.21 4216.45,2741.21 U2.13
U2_14: H4.1 R15.1 U2.14 | length 218.8
  Bottom Layer w10: H4.1@3991.45,2795.66 4033.44,2795.66 4086.76,2742.34 4086.76,2741.21 4116.45,2741.21 U2.14
U4_3: H10.8 R24.1 U4.3 | length 197
  Bottom Layer w10: H10.8@4041.45,1580.66 4089.24,1628.45 4116.45,1628.45 4116.45,1660.11 U4.3
U4_4: H10.7 R25.1 U4.4 | length 407.7
  Top Layer w10: v1@4062.25,1676.63 4162.42,1676.63 U4.4
  Bottom Layer w10: H10.7@3941.45,1580.66 3966.28,1580.66 v1@4062.25,1676.63 ; R25.1@4216.45,1660.11 U4.4
  other v1: 4062.25,1676.63
U4_5: H10.6 R26.1 U4.5 | length 583.3
  Top Layer w10: H10.6@3841.45,1580.66 3885.42,1624.63 4169.28,1624.63 v1(4175.07,1618.84)
  Bottom Layer w10: v1(4175.07,1618.84) 4184.61,1628.38 4255.03,1628.38 4286.76,1660.11 4316.45,1660.11 U4.5
U4_6: H10.5 R27.1 U4.6 | length 807.7
  Top Layer w10: H10.5@3741.45,1580.66 3807.26,1646.47 4332.26,1646.47 U4.6
  Bottom Layer w10: R27.1@4416.45,1660.11 U4.6
U4_7: U4.7
U4_11: H10.4 R20.1 U4.11 | length 1397.9
  Bottom Layer w10: H10.4@3641.45,1580.66 3686.67,1535.44 4415.68,1535.44 4463.32,1583.08 4463.32,1983.79 U4.11 R20.1@4416.45,2101.21
U4_12: H10.3 R21.1 U4.12 | length 1031.9
  Top Layer w10: H10.3@3541.45,1580.66 3794.98,1834.19 4119.98,1834.19 U4.12
  Bottom Layer w10: U4.12 R21.1@4316.45,2101.21
U4_13: H10.2 R22.1 U4.13 | length 1031.9
  Top Layer w10: H10.2@3441.45,1580.66 3740.27,1879.48 4065.27,1879.48 U4.13
  Bottom Layer w10: U4.13 R22.1@4216.45,2101.21
U4_14: H10.1 R23.1 U4.14 | length 1193.3
  Bottom Layer w10: H10.1@3341.45,1580.66 3383.44,1580.66 3383.44,1591.16 3465.17,1672.89 4023.64,1672.89 4066.37,1715.62 4066.37,1756.46 4116.45,1806.54 U4.14 R23.1@4116.45,2101.21
U5_1: H3.5 U5.1 U6.1 | length 1216.6
  Bottom Layer w10: U6.1@5526.45,1930.66 5526.45,1888.17 5686.45,1728.17 5686.45,1583.77 5716.36,1553.86 5789.65,1553.86 5836.45,1600.66 6166.45,1930.66 U5.1@6321.45,1930.66
U5_2: H3.3 U5.2 U6.2 | length 1344
  Top Layer w10: U6.2@5526.45,2030.66 5570.2,2074.41 6277.7,2074.41 U5.2@6321.45,2030.66
  Bottom Layer w10: U6.2@5526.45,2030.66 5481.55,1985.76 5481.55,1755.56 H3.3@5636.45,1600.66
U5_7: U5.7
U5_9: H3.4 U5.9 | length 1148.1
  Bottom Layer w10: H3.4@5736.45,1600.66 5814.18,1678.39 5814.18,2423.39 U5.9@6021.45,2630.66
U5_10: U5.10 U6.9 | length 836.4
  Top Layer w10: U6.9@5226.45,2630.66 5276.45,2580.66 5971.45,2580.66 U5.10@6021.45,2530.66
U6_7: U6.7
U6_10: U6.10
VBAT: U7.1
VCC: C1.2 C3.2 C4.2 C6.1 C8.2 C10.2 C11.2 H9.1 LED3.1 LED4.1 P1.1 P1.2 P2.1 R2.2 R7.1 R12.2 R13.2 R14.2 R15.2 R16.2 R17.2 R18.2 R19.2 R20.2 R21.2 R22.2 R23.2 R24.2 R25.2 R26.2 R27.2 U2.16 U4.16 U7.9 U7.24 U7.36 U7.48 U8.2 U8.4 | length 11717.3
  Top Layer w10: U8.4@1911.45,1725.58 2060.52,1725.58 2124.95,1661.15 ; C6.1@1981.45,2108.14 C6.1@1981.45,2082.96 ; LED3.1@2124.95,1630.66 LED3.1@2124.95,1645.91 ; C4.2 C3.2 C11.2 C10.2 2197,2185.97 2174.55,2185.97 2144.79,2156.21 ; H9.1@2256.45,1580.66 2169.95,1580.66 LED3.1 2124.95,1635.66 2124.95,1661.15 ; R7.1@2411.45,2591.21 2441.14,2591.21 2645.59,2795.66 2776.45,2795.66 P1.2@2876.45,2795.66 ; U7.48 v1@2966.58,2032.67 ; v1(2962.04,2037.2) v1@2966.58,2032.67 ; U7.24 2934.89,2307.21 2934.89,2280.63 2855.81,2201.55 2787.45,2201.55 U7.36 2648.34,2104.18 2198.79,2104.18 2197,2105.97 C1.2 2165.34,2135.66 2144.79,2156.21 ; U7.9 3091.12,2120.58 3054.49,2120.58 v1@2966.58,2032.67 ; LED4.1 3161.45,1691.65 3118.34,1734.76 2124.95,1734.76 ; R2.2 3765.9,2520.11 U2.16 ; U4.16 4001.34,2115.55 v1(4074.38,2115.55) ; C6.1@1981.45,2082.96 1988.51,2082.96 2061.76,2156.21 2091.45,2156.21 2117.17,2156.21 2144.79,2156.21 ; C6.1@1981.45,2082.96 1981.45,2057.78 1937.8,2014.13 1911.45,2014.13 1911.45,1965.74 1911.45,1917.35 2094.04,1734.76 2124.95,1734.76 ; 2124.95,1661.15 2124.95,1734.76
  Bottom Layer w10: P2.1@2206.45,2795.66 2247.44,2795.66 ; H9.1@2256.45,1580.66 2256.45,1622.65 2247.44,1631.66 2247.44,2795.66 ; P1.1@2776.45,2795.66 2735.46,2795.66 2693.17,2837.95 2289.73,2837.95 2247.44,2795.66 ; P1.2@2876.45,2795.66 2955.16,2795.66 ; v1(2962.04,2037.2) 2955.16,2044.08 2955.16,2795.66 ; v1(4074.38,2115.55) 4097.28,2138.45 4116.45,2138.45 4116.45,2170.11 R23.2@4131.3,2170.11 ; R24.2@4116.45,1591.21 4146.14,1591.21 4161.37,1591.21 ; R16.2@4116.45,2231.21 4116.45,2184.96 R23.2@4131.3,2170.11 ; R17.2@4216.45,2231.21 R17.2@4216.45,2215.94 ; R21.2@4316.45,2170.11 4316.45,2200.66 ; R18.2@4316.45,2231.21 R18.2@4316.45,2215.94 ; R27.2@4416.45,1591.21 4316.45,1591.21 4216.45,1591.21 4161.37,1591.21 ; R20.2@4416.45,2170.11 4416.45,2200.66 ; R19.2@4416.45,2231.21 4416.45,2200.66 ; R12.2@4416.45,2810.11 4316.45,2810.11 4216.45,2810.11 4116.45,2810.11 4086.76,2810.11 4040.98,2855.89 3762.16,2855.89 3749.07,2842.8 ; 2955.16,2795.66 3002.3,2842.8 3749.07,2842.8 ; 3749.07,2842.8 3749.07,2774.87 3853.28,2670.66 U2.16 4115.64,2471.47 4279.02,2471.47 4360.2,2390.29 4360.2,2200.66 ; R23.2@4131.3,2170.11 4146.14,2170.11 4161.37,2154.88 ; 4161.37,1591.21 4152.01,1600.57 4152.01,1628.39 4161.37,1637.75 4161.37,2154.88 ; 4161.37,2154.88 4176.6,2170.11 4216.45,2170.11 R17.2@4216.45,2215.94 ; R17.2@4216.45,2215.94 R18.2@4316.45,2215.94 ; 4316.45,2200.66 4360.2,2200.66 ; 4316.45,2200.66 R18.2@4316.45,2215.94 ; 4360.2,2200.66 4416.45,2200.66
VCC_THR: H3.1 R28.2 R29.2 R30.2 R31.2 R32.2 R33.2 R34.2 R35.2 R36.2 R37.2 R38.2 R39.2 R40.2 R41.2 R42.2 R43.2 U5.16 U6.16 | length 4865.7
  Top Layer w10: U6.16@5226.45,1930.66 5269.01,1888.1 v1(5692.03,1888.1) 5978.89,1888.1 U5.16@6021.45,1930.66
  Bottom Layer w10: R42.2 R43.2 5077,2460.35 4990.79,2546.56 4990.79,2822.13 4985,2827.92 4906.61,2827.92 4897.45,2818.76 4897.45,2425.05 5062.15,2260.35 5077,2260.35 R41.2 R40.2 5077,2080.11 5226.45,1930.66 5226.45,1852.65 5436.45,1642.65 H3.1@5436.45,1600.66 ; R36.2 5680.9,2400.97 5680.9,2365.35 5675.9,2360.35 5675.9,2345.51 R37.2 R38.2 R39.2 5675.9,1904.23 v1(5692.03,1888.1) ; R35.2 R34.2 R33.2 R32.2 5872,2080.11 6021.45,1930.66 6265.2,2174.41 6470.9,2174.41 ; R31.2 6470.9,2174.41 ; R28.2 R29.2 R30.2 6470.9,2174.41
pads on no net: U3. U3.0

## Polygon pours and split planes (outlines as drawn)
GND on Bottom Layer (solid): 1506.45,1505.66 6756.45,1505.66 6761.45,1510.66 6761.45,2890.66 1506.45,2890.66
GND on Top Layer (solid): 1506.45,2890.66 6761.45,2890.66 6761.45,1510.66 1511.45,1510.66 1506.45,1505.66

## Silkscreen, mask and mechanical layers (free items; w line width, h text height)
Top Overlay:
  text "SDA" at 3036.45,2840.82 h19.68
  text "SCL" at 3136.45,2840.82 h19.68
  text "VCC" at 2181.45,2830.82 h19.68
  text "SWDIO" at 2261.25,2830.82 h19.68
  text "SWCLK" at 2368.95,2830.82 h19.68
  text "GND" at 2486.45,2830.82 h19.68
  text "BTTN_1" at 3266.45,2665.98 h39.37
  text "I2C" at 3036.45,2660.98 h39.37
  text "BTTN_2" at 5781.81,2656.14 h39.37
  text "BTTN_1" at 4896.45,2645.98 h39.37
  text "GND" at 6626.45,1880.98 h39.37
  text "GND" at 4691.45,1795.98 h39.37
  text "THR CONN" at 5646.45,1710.98 h39.37
  text "VCC" at 5406.45,1658.85 h23.62
  text "GND" at 5506.45,1658.85 h23.62
  text "CLK" at 5606.45,1658.85 h23.62
  text "DAT" at 5711.45,1658.85 h23.62
  text "LAT" at 5811.45,1658.85 h23.62
  text "PA8" at 5906.45,1658.85 h23.62
  text "PA9" at 6011.45,1658.85 h23.62
  text "PA10" at 6111.45,1658.85 h23.62
  text "PA8" at 6411.45,1658.85 h23.62
  text "PA9" at 6516.45,1658.85 h23.62
  text "PA10" at 6616.45,1658.85 h23.62
  text "VCC" at 2221.45,1628.85 h23.62
  text "GND" at 2321.45,1628.85 h23.62
  text "CLK" at 2421.45,1628.85 h23.62
  text "DAT" at 2526.45,1628.85 h23.62
  text "LAT" at 2626.45,1628.85 h23.62
  text "PA8" at 2721.45,1628.85 h23.62
  text "PA9" at 2826.45,1628.85 h23.62
  text "PA10" at 2926.45,1628.85 h23.62
  text "BTTN_2" at 3296.45,1625.98 h39.37
  text "STM32HOTAS" at 1536.45,1563.85 h23.62
  text "STM32HOTAS" at 4891.45,1558.85 h23.62
  text "STICK" at 1686.45,1528.85 h23.62
  text "THROTTLE" at 5041.45,1523.85 h23.62
  text "PWR" at 2041.45,1510.98 h39.37